# Altium PCB H-bridge.PcbDoc
Units mm, origin at the board's own origin, x right, y up, seen from the top; angles counter-clockwise.
Board outline 77.09 x 44.96 mm, 2 copper layers (Top Layer, Bottom Layer); 21 components, 31 nets, 83 pads, 7 vias.
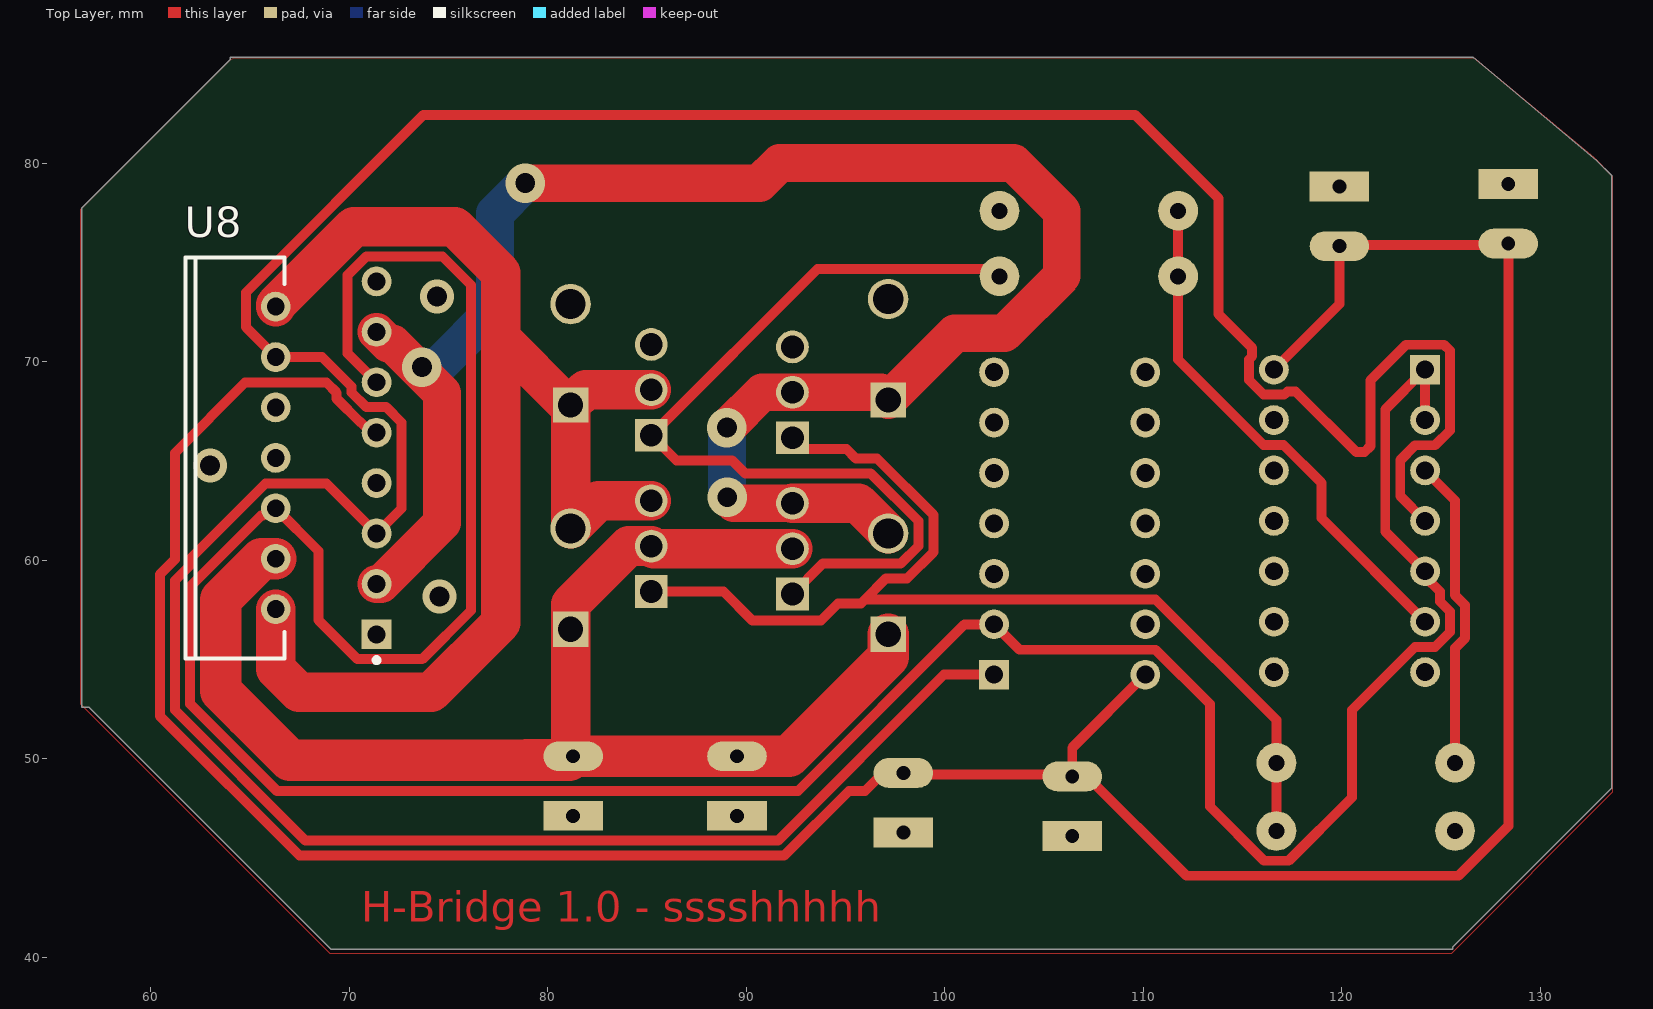
[diagram p0: Top Layer view]
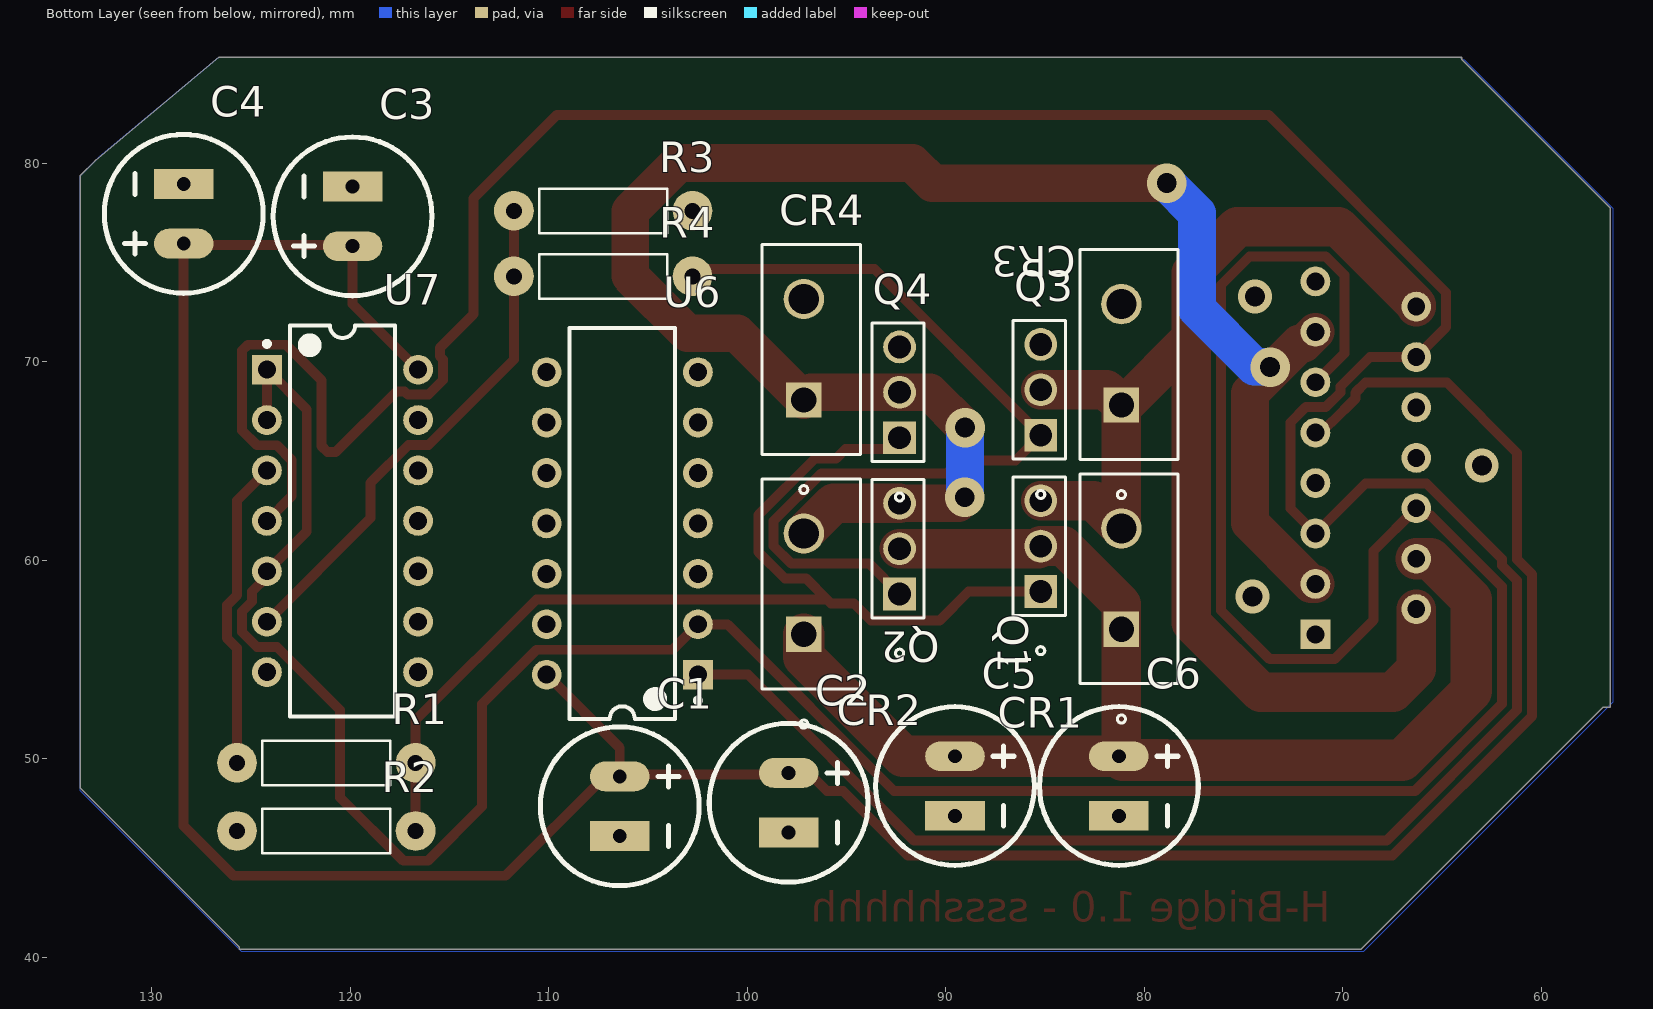
[diagram p1: Bottom Layer view, seen from below]

## Layer stack, top to bottom
Top Solder: solder mask 0.0102, Solder Resist, Dk 3.5
Top Layer: signal copper 0.0356
Dielectric 1: dielectric 0.32, FR-4, Dk 4.8
Bottom Layer: signal copper 0.0356
Bottom Solder: solder mask 0.0102, Solder Resist, Dk 3.5

## Board outline
64.008,85.344 64.008,85.217 56.515,77.724 56.515,52.578 56.896,52.578 69.088,40.386 125.603,40.386 125.603,40.513 133.604,48.514 133.604,79.375 132.842,80.137 126.619,85.344

## Design rules (kind name [scope] priority, off if disabled: settings)
Clearance [All] p1: gap=0.254 ignorepadtopadclearanceinfootprint=FALSE
PolygonConnect [All] p1: connectstyle=Relief reliefconductorwidth=0.254 reliefentries=4 polygonreliefangle="90 Angle" airgapwidth=0.254
RoutingVias [All] p1: holewidth=0.711 width=0.12 viastyle="Through Hole" minholewidth=0.711 minwidth=0.12 maxholewidth=0.711 maxwidth=5
SolderMaskExpansion [All] p1: expansion=0.102 istentingtop=FALSE
SupplyNets "Schematic Supply Nets_2" [InNet('GND')] p1: voltage=0.000
SupplyNets "Schematic Supply Nets_1" [InNet('+5')] p2: voltage=0.000
SupplyNets "Schematic Supply Nets" [InNet('+12')] p3: voltage=0.000
Width [All] p1: maxlimit=5 minlimit=0.5 preferedwidth=0.5 minimp=50.000000 maximp=50.000000 favimp=50.000000
30 further rules are at their usual default settings.

## Classes and differential pairs
component class "Schematic 1.0": J2
component class H-bridge: Q?

## Components (designator, comment, footprint, x,y, rotation, side; value= is the part's Value field where it differs from the comment)
C1 "Cap" "Cap Lyt Ø8" 106.426,49.101 r270 bottom value=1uF
C2 "Cap" "Cap Lyt Ø8" 97.917,49.276 r270 bottom value=100nF
C3 "Cap" "Cap Lyt Ø8" 119.888,75.819 r90 bottom value=1uF
C4 "Cap" "Cap Lyt Ø8" 128.397,75.946 r90 bottom value=100nF
C5 "Cap" "Cap Lyt Ø8" 89.535,50.117 r270 bottom value=100uF
C6 "Cap" "Cap Lyt Ø8" 81.28,50.117 r270 bottom value=1uF
CR1 "BYV29-400" SOD59_WEN 81.153,56.515 r90 bottom
CR2 "BYV29-400" SOD59_WEN 97.155,56.261 r90 bottom
CR3 "BYV29-400" SOD59_WEN 81.153,67.818 r90 bottom
CR4 "BYV29-400" SOD59_WEN 97.155,68.072 r90 bottom
Q1 "IRLU024NPBF" PG-TO251-3-901_INF 85.217,58.42 r90 bottom
Q2 "IRLU024NPBF" PG-TO251-3-901_INF 92.329,58.293 r90 bottom
Q3 "IRLU024NPBF" PG-TO251-3-901_INF 85.217,66.294 r90 bottom
Q4 "IRLU024NPBF" PG-TO251-3-901_INF 92.329,66.167 r90 bottom
R1 "Resistor" "RES THT 9mm" 116.713,49.784 r0 bottom value=100
R2 "Resistor" "RES THT 9mm" 125.713,46.355 r180 bottom value=10K
R3 "Resistor" "RES THT 9mm" 102.76,77.597 r0 bottom value=10K
R4 "Resistor" "RES THT 9mm" 111.76,74.295 r180 bottom value=100
U6 "SN74HC04N" N0014A 106.299,61.849 r0 bottom
U7 "SN74HC08N" N0014A 120.396,61.976 r180 bottom
U8 "L298N" STM-FM-15 68.834,65.151 r180 top

## Footprints (in the part's own frame and the unit in brackets; to place one, negate y for a bottom-side part, rotate by r counter-clockwise, add the part's x,y. Pads: shape width x height; smd on the part's side, far side on the other; paste and mask are expansions set on the pad)
"Cap Lyt Ø8" [mm] "Capacitor"
  oval 1.5x3 hole 0.7: 1(0,0)
  rect 1.5x3 hole 0.7: 2(3,0)
  silkscreen extent -2.5,-4 5.5,4
N0014A [mm] "DIP, 14-Leads, Body 19.7x6.6mm, Pitch 2.54mm"
  rect 1.5x1.5 hole 0.9: 1(-3.81,7.62)
  round 1.5 hole 0.9: 2(-3.81,5.08) 3(-3.81,2.54) 4(-3.81,0) 5(-3.81,-2.54) 6(-3.81,-5.08) 7(-3.81,-7.62) 8(3.81,-7.62) 9(3.81,-5.08) 10(3.81,-2.54) 11(3.81,0) 12(3.81,2.54) 13(3.81,5.08) 14(3.81,7.62)
  silkscreen extent -3.93,-9.85 2.65,9.85, body extent -3.95,-9.85 3.95,9.85, height 5.08
PG-TO251-3-901_INF [mil]
  rect 65x65 / inner round 60 / far side rect 65x65 hole 45 paste-99999 mask+0: 1(0,0)
  round 65 / inner round 60 / far side round 65 hole 45 paste-99999 mask+0: 2(90,0) 3(180,0)
  silkscreen extent -125,-49 228,55, body extent -43,-44 222,50, height 384
"RES THT 9mm" [mm]
  round 2 hole 0.8: 1(0,0) 2(9,0)
  silkscreen extent 1.28,-1.12 7.73,1.12, body extent -0.32,-1.13 9.28,1.13, height 2.36
SOD59_WEN [mil]
  rect 70x70 / inner round 60 / far side rect 70x70 hole 50 paste-99999 mask+0: 1(0,0)
  round 80 / inner round 60 / far side round 80 hole 60 paste-99999 mask+0: 2(200,0)
  silkscreen extent -186,-113 308,82
STM-FM-15 [mm] "FM, 15-Leads, Body 20.2x5mm, Pitch 1.27mm"
  rect 1.5x1.5 hole 0.9: 1(-2.54,8.89)
  round 1.5 hole 0.9: 2(2.54,7.62) 3(-2.54,6.35) 4(2.54,5.08) 5(-2.54,3.81) 6(2.54,2.54) 7(-2.54,1.27) 8(2.54,0) 9(-2.54,-1.27) 10(2.54,-2.54) 11(-2.54,-3.81) 12(2.54,-5.08) 13(-2.54,-6.35) 14(2.54,-7.62) 15(-2.54,-8.89)
  silkscreen extent -2.67,-10.1 7.09,10.31, body extent -2.8,-10.1 7.09,10.1, height 21

## Part data
C1 C2 C3 C4 C5 C6: library part "Capacitor electrolytic"
CR1 CR2 CR3 CR4: library part BYV29-500, "No Description Available", Manufacturer_Name="WeEN Semiconductors", Copyright="Copyright (C) 2025 Ultra Librarian. All rights reserved.", Manufacturer_Part_Number=BYV29-500
Q1 Q2 Q3 Q4: "The IR MOSFET family of power MOSFETs utilizes proven silicon processes offering designers a wide portfolio of devices to support various applications such as DC motors, inverters, SMPS, lighting, load switches as well as battery powered applications.The devices are available in a variety of surface mount and through-hole packages with industry standard footprints for ease of design.", Manufacturer_Name=Infineon, Copyright="Copyright (C) 2025 Ultra Librarian. All rights reserved.", Datasheet=https://www.infineon.com/dgdl/irlr024npbf.pdf?fileId=5546d462533600a4015356694f7f265d, Manufacturer_Part_Number=IRLU024NPBF
U6: library part CMP-1615-00892-2, "Hex Inverters, N0014A, TUBE", F @ Nom Voltage(Max)(Mhz)=20, Generic Part Number=SN74HC04, ICC @ Nom Voltage(Max)(mA)=0.02, Manufacturer="Texas Instruments", Operating Temperature Range(C)="-40 to 85", Rating=Catalog, Voltage(Nom)(V)=5, Bits(#)=6, Code_JEDEC=MS-001, DatasheetVersion=SCLS078F, Input Type=CMOS, Output Drive (IOL/IOH)(Max)(mA)=-4/4, Output Type=CMOS, PackageReference=N0014A, Schmitt Trigger=No, Technology Family=HC, tpd @ Nom Voltage(Max)(ns)=20, VCC(Max)(V)=6, VCC(Min)(V)=2
U7: library part CMP-0777-00250-3, "Quadruple 2-Input Positive-AND Gates, N0014A, TUBE", F @ Nom Voltage(Max)(Mhz)=70, Generic Part Number=SN74HC08, ICC @ Nom Voltage(Max)(mA)=0.02, Manufacturer="Texas Instruments", Operating Temperature Range(C)="-40 to 85", Rating=Catalog, tpd @ Nom Voltage(Max)(ns)=28, Voltage(Nom)(V)=5, Bits(#)=4, DatasheetVersion=SCLS081F, Input Type=CMOS, Output Type=CMOS, PackageReference=N0014A, Schmitt Trigger=No, Technology Family=HC, VCC(Max)(V)=6, VCC(Min)(V)=2
U8: library part CMP-2000-06526-1, "Dual Full-Bridge Driver, 4.8 to 46 V, -40 to 150 degC, 15-Pin FM (MW 15L), RoHS, Tube", Driver Case Style=Multiwatt, Manufacturer=STMicroelectronics, Operating Temperature Max=130°C, Operating Temperature Min=-25°C, Output Current=2A, Output Voltage=46V, Package Description="15-Pin Flange Mount, Body 5 x 19.6 mm, Pitch 1.27 mm", Package Reference=FM-15, PartNumber=L298, Supply Voltage Max=7V, Supply Voltage Min=4.5V, Automotive Qualification Standard=-, Datasheet URL=https://datasheet.ciiva.com/15109/getdatasheetpartid-50682-15109332.pdf, Datasheet Version=01/2000, Manufacturer URL=http://www.st.com/, Motor Type=FullBridge, Mounting Technology=ThroughHole, MSL=-, No. of Outputs=4Outputs, No. of Pins=15Pins, Packaging=Each, Product Range=-, SVHC=NoSVHC(17-Dec-2015)

## Via types
v1: diameter 2, hole 1, Top Layer to Bottom Layer, 4 vias
v2: diameter 1.7, hole 1, Top Layer to Bottom Layer, 3 vias

## Nets (pads, with @x,y where several pads share a name; then routed paths per layer and width w, separated by ;. In a path a pad name is that pad's centre, name@x,y a point inside that pad or via, vN(x,y) a via of type N, cw(c..) or ccw(c..) an arc to the next point about the centre after c; other vN are vias at no path point)
+5: C1.1 C2.1 C3.1 C4.1 U6.14 U7.14 U8.9 | length 154.3
  Top Layer w0.5: U8.9 71.103,66.421 70.571,66.953 70.542,66.953 69.366,68.129 69.366,68.429 68.85,68.945 64.754,68.945 61.214,65.405 61.214,60.04 60.46,59.286 60.46,52.134 67.485,45.109 91.918,45.109 95.18,48.371 95.991,48.371 96.896,49.276 C2.1 98.004,49.188 106.338,49.188 C1.1 ; U6.14 106.426,50.546 C1.1 ; U7.14 119.888,72.898 C3.1 119.951,75.882 128.333,75.882 C4.1 128.397,46.609 125.885,44.097 112.18,44.097 107.176,49.101 C1.1
+12: C5.1 C6.1 CR1.1 CR2.1 Q1.2 Q2.2 U8.4 | length 66.8
  Top Layer w2: C6.1 81.153,50.244 CR1.1 81.153,57.78 84.079,60.706 Q1.2 85.344,60.579 Q2.2
  Top Layer w2.1: U8.4 65.576,60.071 63.522,58.017 63.522,53.403 64.802,52.123 67.014,49.911 78.914,49.911 78.928,49.925 81.088,49.925 C6.1 C5.1 92.154,50.117 97.155,55.118 CR2.1
GND: C1.2 C2.2 C3.2 C4.2 C5.2 C6.2 CR3.2 CR4.2 Q3.3 Q4.3 R2.1 R3.1 U6.3 U6.4 U6.5 U6.6 U6.7 U6.8 U6.9 U6.10 U6.11 U6.12 U6.13 U7.7 U7.8 U7.9 U7.10 U7.11 U7.12 U7.13 U8.1 U8.8 U8.15
  other v2: 74.549,58.166 62.992,64.77 74.422,73.279
NetCR1_2: CR1.2 CR3.1 Q1.3 Q3.2 U8.2 U8.14 | length 68.1
  Top Layer w2: U8.2 66.294,54.512 67.466,53.34 74.136,53.34 77.634,56.838 77.634,71.182 ; U8.14 66.294,72.861 70.232,76.799 75.315,76.799 77.634,74.48 77.634,71.182 ; Q1.3 82.559,62.992 81.162,61.595 CR1.2 CR3.1 ; Q3.2 81.915,68.58 CR3.1 ; 77.634,71.182 80.998,67.818 CR3.1
NetCR2_2: CR2.2 CR4.1 Q2.3 Q4.2 U8.3 U8.13 | length 92
  Top Layer w1.9: U8.3 71.597,58.801 74.676,61.88 74.676,68.422 72.183,70.915 71.96,70.915 U8.13 ; v1(78.867,78.994) 90.671,78.994 91.687,80.01 103.464,80.01 105.903,77.57 105.903,74.322 103.005,71.423 100.506,71.423 CR4.1 96.774,68.453 Q4.2 90.805,68.453 v1(89.027,66.675) ; v1(89.047,63.168) 89.074,63.168 89.377,62.865 Q2.3
  Top Layer w2: Q2.3 95.64,62.865 97.155,61.35 CR2.2
  Bottom Layer w1.9: v1(73.66,69.723) 73.679,69.742 74.441,69.742 77.343,72.644 77.343,77.47 v1(78.867,78.994) ; v1(89.027,66.675) 89.037,66.665 89.037,63.178 v1(89.047,63.168)
NetJ1_1: 
NetJ2_3: 
NetJ2_4: 
NetJ2_5: 
NetJ3_4: 
NetJ3_5: 
NetJ3_6: 
NetJ4_4: 
NetJ4_5: 
NetJ4_6: 
NetJ5_1: 
NetJ6_1: 
NetP2_1: 
NetP2_2: 
NetQ1_1: Q1.1 Q4.1 R1.1 R2.2 | length 55.7
  Top Layer w0.5: Q1.1 88.85,58.42 90.306,56.964 93.773,56.964 94.625,57.815 95.779,57.815 95.987,58.023 ; Q4.1 92.905,65.591 95.054,65.591 95.523,65.123 96.589,65.123 99.429,62.283 99.429,60.399 98.097,59.067 97.031,59.067 95.987,58.023 ; R2.2 116.713,51.938 110.628,58.023 95.987,58.023
NetQ2_1: Q2.1 Q3.1 R4.2 | length 45
  Top Layer w0.5: Q2.1 93.857,59.821 97.785,59.821 98.675,60.711 98.675,61.971 96.277,64.369 89.952,64.369 89.297,65.024 86.487,65.024 Q3.1 93.595,74.672 101.977,74.672 102.354,74.295 R4.2
NetR1_2: R1.2 U7.3 | length 15.8
  Top Layer w0.5: U7.3 125.713,63.009 125.713,58.229 126.214,57.728 126.214,56.064 125.713,55.563 R1.2
NetR3_2: R3.2 R4.1 U7.6 | length 26.4
  Top Layer w0.5: R3.2 R4.1 111.76,70.109 116.067,65.802 117.073,65.802 118.981,63.894 118.981,62.121 U7.6
NetU2_5: 
NetU2_6: 
NetU2_7: 
NetU3_J1_18: 
NetU3_J1_19: 
NetU3_J1_20: 
NetU6_1: U6.1 U7.4 U8.5 U8.12 | length 176.4
  Top Layer w0.5: U6.1 99.972,54.229 91.606,45.863 67.798,45.863 61.214,52.447 61.214,58.973 61.968,59.727 61.968,60.058 65.775,63.865 68.85,63.865 U8.5 72.628,62.595 72.628,66.94 71.861,67.707 70.855,67.707 70.12,68.442 70.12,68.741 68.63,70.231 U8.12 64.79,71.735 64.79,73.484 73.729,82.423 109.601,82.423 113.792,78.232 113.792,72.39 115.492,70.69 115.492,70.276 115.332,70.115 115.332,69.077 116.067,68.342 117.105,68.342 117.266,68.502 117.68,68.502 120.737,65.445 121.151,65.445 121.444,65.738 121.444,69.047 123.247,70.85 125.165,70.85 125.46,70.555 125.46,66.537 124.709,65.786 123.703,65.786 122.952,65.035 122.952,63.23 U7.4
NetU6_2: U6.2 U7.1 U7.2 U7.5 U8.6 U8.11 | length 159.6
  Top Layer w0.5: U8.11 69.92,70.415 69.92,74.36 70.855,75.295 74.692,75.295 76.13,73.857 76.13,57.461 73.676,55.007 70.415,55.007 68.45,56.972 68.45,60.455 U8.6 66.023,62.611 65.651,62.238 65.545,62.238 61.968,58.661 61.968,52.759 66.37,48.357 79.557,48.357 79.571,48.371 92.606,48.371 100.989,56.754 102.474,56.754 U6.2 103.775,55.483 110.628,55.483 113.359,52.752 113.359,47.582 116.09,44.851 117.336,44.851 120.519,48.034 120.519,52.443 123.703,55.626 124.709,55.626 125.46,56.377 125.46,57.415 124.959,57.916 124.959,58.412 124.206,59.165 U7.5 122.198,61.444 122.198,67.588 U7.1 U7.2
pads on no net: U8.7 U8.10

## Polygon pours and split planes (outlines as drawn)
GND on Bottom Layer "NONET_L02_P000" (solid, shelved, pour order 0): 63.881,85.217 56.388,77.724 56.388,52.832 68.961,40.259 125.476,40.259 133.604,48.387 133.604,48.641 133.604,79.375 132.651,80.328 126.619,85.344 64.135,85.344
GND on Top Layer "NONET_L01_P001" (solid, shelved, pour order 1): 63.944,85.153 56.451,77.66 56.451,52.768 69.025,40.195 125.539,40.195 133.667,48.323 133.667,48.578 133.667,79.311 132.715,80.264 126.682,85.281 64.198,85.281

## Other copper
Top Layer:
  text "H-Bridge 1.0 - sssshhhhh" at 70.612,41.783 h1.52